# Altium PCB LoraNode.PcbDoc
Units mil, origin at the board's own origin, x right, y up, seen from the top; angles counter-clockwise.
Board outline 3242.69 x 2099.03 mil, 2 copper layers (Top Layer, Bottom Layer); 65 components, 42 nets, 235 pads, 95 vias.
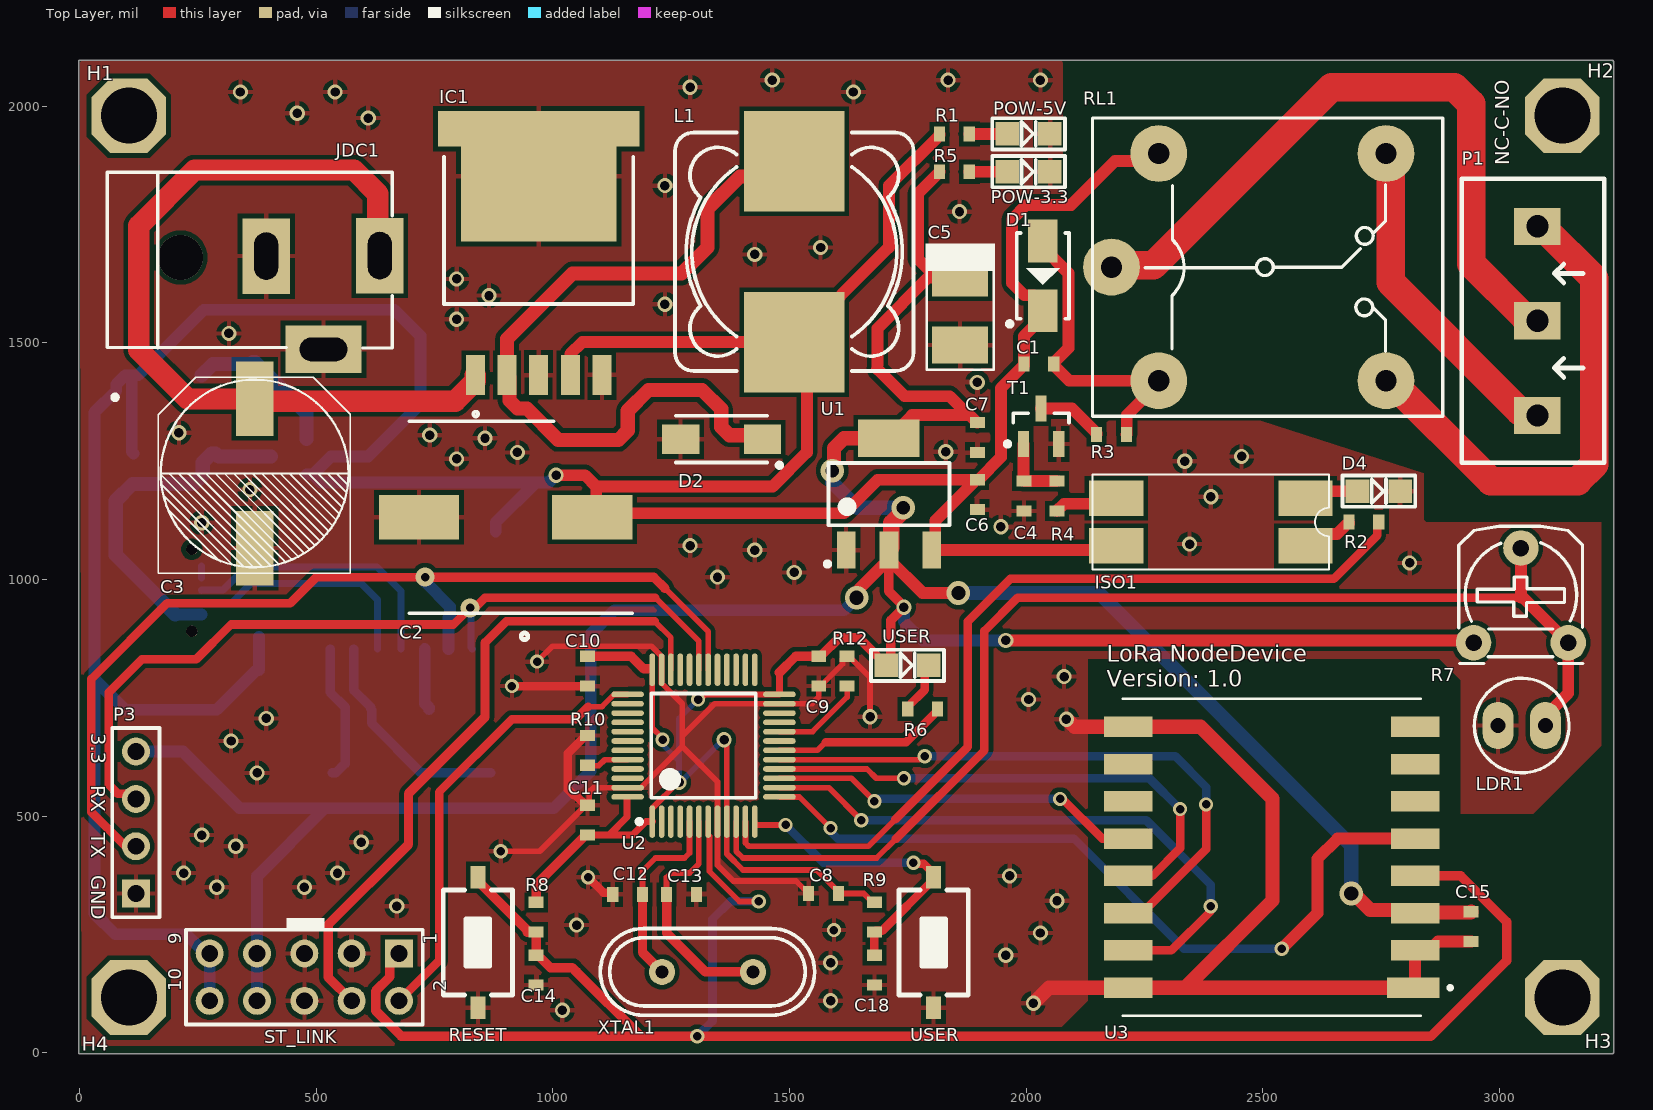
[diagram p0: Top Layer view]
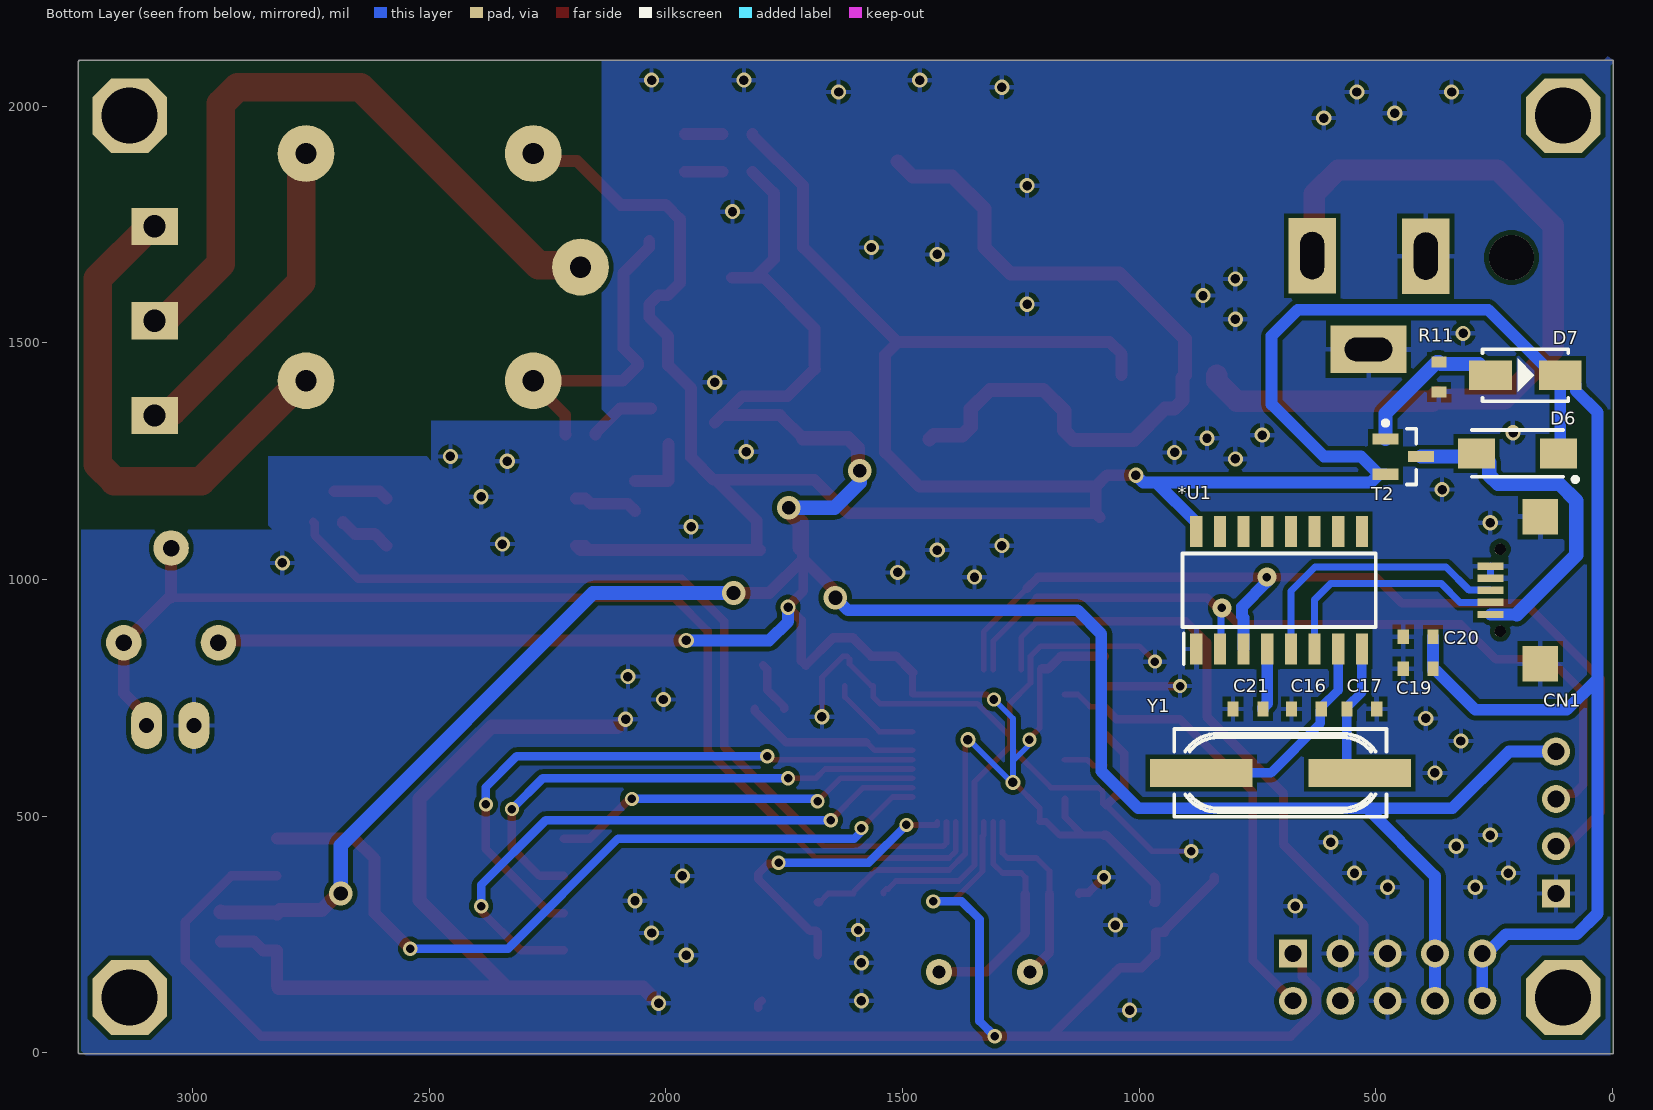
[diagram p1: Bottom Layer view, seen from below]
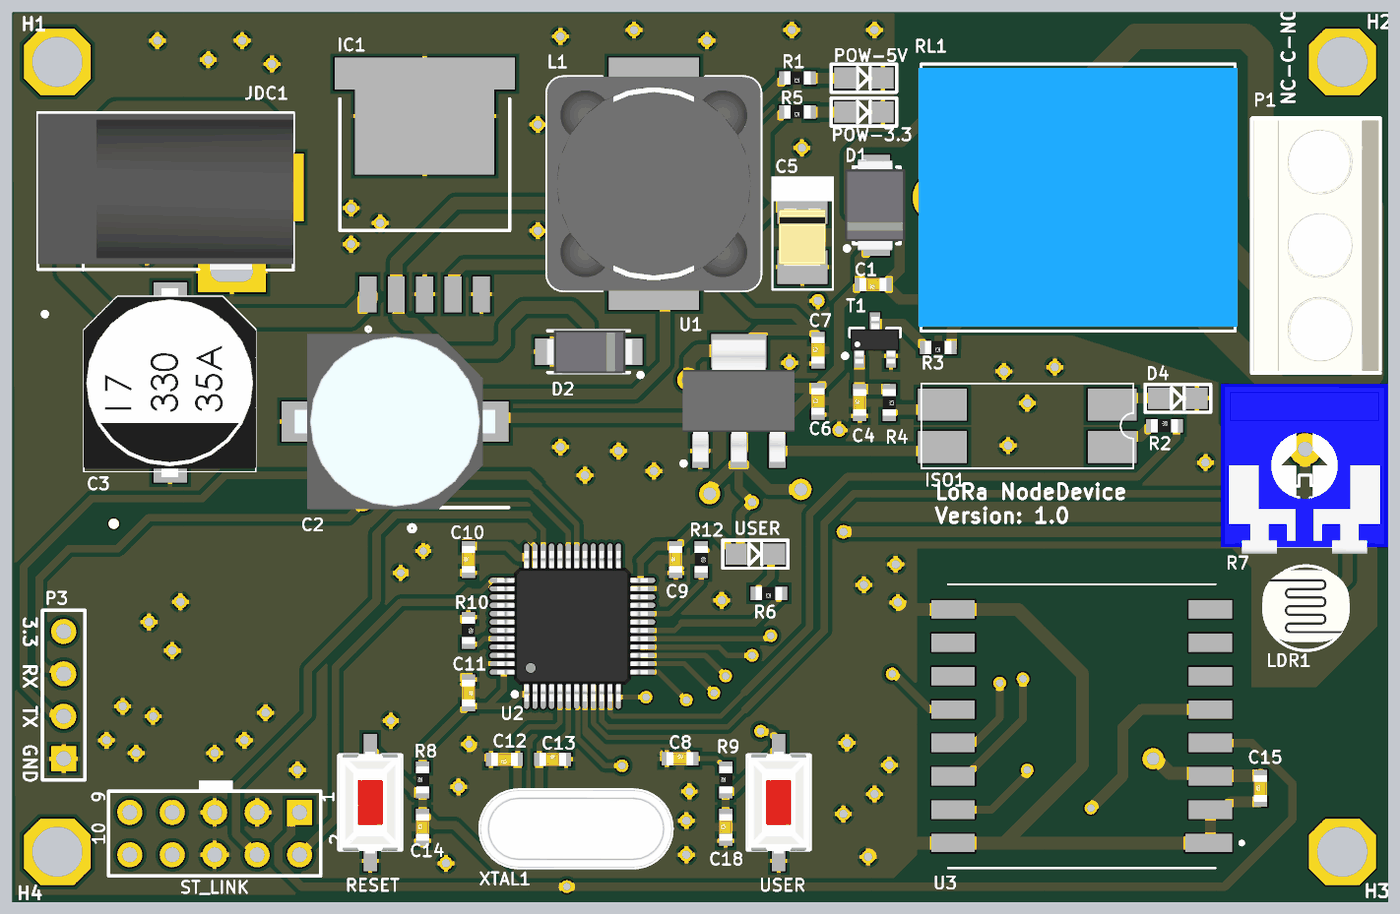
[diagram p2: 3D render of the assembled board from above, using the file's embedded part models]
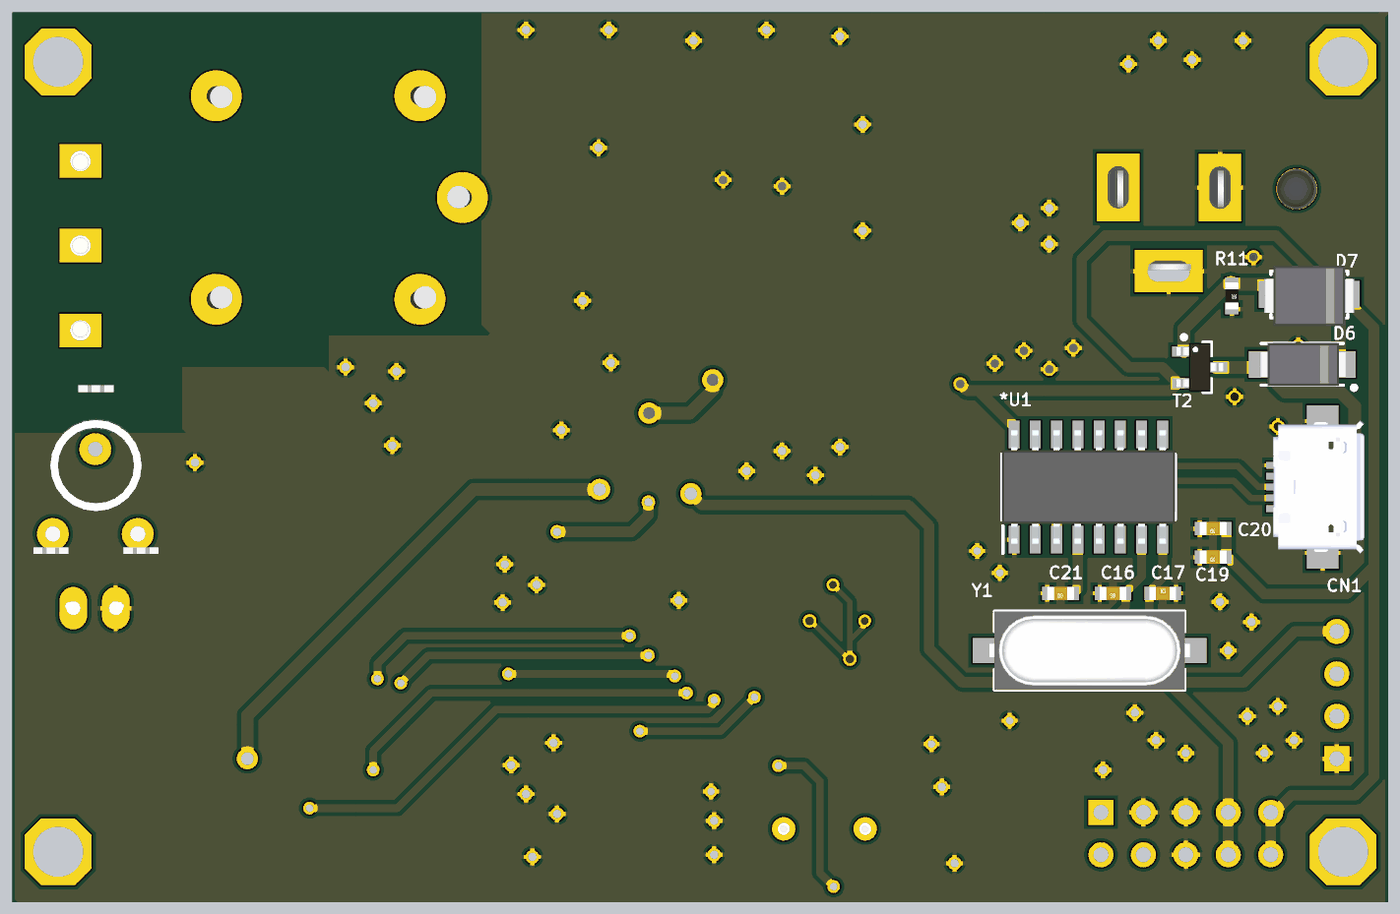
[diagram p3: 3D render of the assembled board from below, using the file's embedded part models]

## Layer stack, top to bottom
Top Solder: solder mask 0.4, Solder Resist, Dk 3.5
Top Layer: signal copper 1.4
Dielectric 1: dielectric 12.6, FR-4, Dk 4.8
Bottom Layer: signal copper 1.4
Bottom Solder: solder mask 0.4, Solder Resist, Dk 3.5

## Board outline
0,-2.01 cw(c0,0) -2.02,0 -2.02,2095 cw(c0,2095) 0,2097.02 3238.66,2097.02 cw(c3238.66,2095) 3240.68,2095 cw(c3238.66,2095) 3240.56,2094.33 cw(c3238.66,2093.66) 3240.68,2093.66 3240.68,0 cw(c3238.66,0) 3238.66,-2.01

## Design rules (kind name [scope] priority, off if disabled: settings)
Clearance [All] p1: gap=10 ignorepadtopadclearanceinfootprint=FALSE except(0: Arc-SMDPad Arc-Hole Track-SMDPad Track-Hole SMDPad-SMDPad SMDPad-Hole THPad-Hole Via-Hole Fill-Hole Poly-Hole Region-Hole Text-Hole; 5: Arc-Arc Arc-Track Track-Track)
MinimumSolderMaskSliver [All] p1 off: minsoldermaskwidth=10
PlaneConnect [All] p1: pad.planeconnectstyle=Direct pad.reliefexpansion=20 pad.reliefentries=2 pad.reliefconductorwidth=10 pad.reliefairgap=10 via.planeconnectstyle=Relief via.reliefexpansion=20 via.reliefentries=4 via.reliefconductorwidth=15 via.reliefairgap=30
PolygonConnect PolygonConnect_1 [All] p1: connectstyle=Relief reliefconductorwidth=10 reliefentries=4 polygonreliefangle="90 Angle" airgapwidth=10
PolygonConnect [All] p2: connectstyle=Relief reliefconductorwidth=10 reliefentries=4 polygonreliefangle="45 Angle" airgapwidth=10
RoutingCorners [All] p1: cornerstyle=45-Degree minsetback=80 maxsetback=100
RoutingVias [All] p1: holewidth=18 width=30 viastyle="Through Hole" minholewidth=18 minwidth=30 maxholewidth=30 maxwidth=50
SilkToSilkClearance [All] p1 off: silktosilkclearance=10
SilkToSolderMaskClearance [IsPad] p1 off: minsilkscreentomaskgap=10 clearancetoexposedcopper=TRUE
SolderMaskExpansion [All] p1: expansion=4 istentingtop=FALSE
UnRoutedNet [All] p1: checkbadconnections=TRUE
Width [All] p1: maxlimit=60 minlimit=12 preferedwidth=18
24 further rules are at their usual default settings.

## Components (designator, comment, footprint, x,y, rotation, side; value= is the part's Value field where it differs from the comment)
*U1 "CH340G" SOIC127P680X230-16N 704.39,977.31 r90 bottom
C1 "Cap" "0603 CAP" 2026.46,1455 r180 top value="104, 0603"
C2 "EEEFK1H221P" CAPAE1030X1080N 900,1131.56 r180 top
C3 "Cap Pol2" "Cap SMD 10x10x10,5" 370,1224.04 r270 top value=680uF/16V
C4 "Cap" "0603 CAP" 1995,1176.56 r90 top value="104, 0603"
C5 "Cap Pol2" "Cap size B" 1860,1566.56 r270 top value=10uF/16V
C6 "Cap" "0603 CAP" 1896.61,1179.4 r90 top value="104, 0603"
C7 "Cap" "0603 CAP" 1896.61,1299.95 r90 top value="104, 0603"
C8 "Cap" "0603 CAP" 1571.61,336.56 r0 top value="104, 0603"
C9 "Cap" "0603 CAP" 1561.61,806.52 r90 top value="104, 0603"
C10 "Cap" "0603 CAP" 1073.23,806.52 r90 top value="104, 0603"
C11 "Cap" "0603 CAP" 1073.23,491.56 r270 top value="104, 0603"
C12 "Cap" "0603 CAP" 1157.8,335 r180 top value="104, 0603"
C13 "Cap" "0603 CAP" 1271.61,335 r0 top value="104, 0603"
C14 "Cap" "0603 CAP" 964.72,174.81 r90 top value="104, 0603"
C15 "Cap" "0603 CAP" 2940,266.56 r90 top value="104, 0603"
C16 "Cap" "0603 CAP" 646.61,726.56 r0 bottom value="22pF, 0603"
C17 "Cap" "0603 CAP" 529.39,726.56 r180 bottom value="22pF, 0603"
C18 "Cap" "0603 CAP" 1679.27,174.81 r90 top value="104, 0603"
C19 "Cap" "0603 CAP" 410.57,811.56 r0 bottom value="22uF, 0603"
C20 "Cap" "0603 CAP" 410.57,879.06 r0 bottom value="0.1uF, 0603"
C21 "Cap" "0603 CAP" 770,726.56 r0 bottom value="0.1uF, 0603"
CN1 "Micro USB type B" USB-B-Micro-Hole 152.52,977.31 r270 bottom
D1 "1N4007" "DO 214" 2035,1641.56 r270 top
D2 "D Schottky" DO-214AC 1356.46,1296.56 r180 top
D4 "LED, 0805" LED0805 2745,1186.56 r0 top
D6 "D Schottky" DO-214AC 200.55,1266.56 r0 bottom
D7 "BZT52C5V1" "DO 214" 184.02,1431.56 r180 bottom
H1 "HOLE" HOLE#1 104.27,1980 r0 top
H2 "HOLE" HOLE#1 3132.6,1980 r0 top
H3 "HOLE" HOLE#1 3132.6,117 r0 top
H4 "HOLE" HOLE#2 104.27,145 r0 top
IC1 "LM2596S-5.0" KTT0005B 970,1922.47 r270 top
ISO1 "OPTO" "PC817 SMD" 2540,1121.56 r90 top value=TLP5211
JDC1 "Jac DC" DC-IN 634.39,1684.25 r0 top
L1 "CDRH127 68uH 3A" IND_BOURNS_SRR1260 1510,1692.51 r270 top
LDR1 "CDS 12mm 12528" CDS 2996.78,691.56 r0 top
P1 "Header 3 - M" "Medium - Header 3" 3080,1346.56 r90 top
P3 "Header 4" HDR1X4 119.13,336.56 r90 top
POW-3.3 "LED, 0805" LED0805 2005,1861.56 r0 top (schematic designator D5)
POW-5V "LED, 0805" LED0805 2005,1941.56 r0 top (schematic designator D3)
R1 "Resistor" "0603 RESISTOR" 1848.28,1941.56 r180 top value="330, 0603"
R2 "Resistor" "0603 RESISTOR" 2713.27,1121.56 r0 top value="330, 0603"
R3 "Resistor" "0603 RESISTOR" 2180.12,1306.56 r180 top value="1K, 0603"
R4 "Resistor" "0603 RESISTOR" 2065,1176.56 r270 top value="1K, 0603"
R5 "Resistor" "0603 RESISTOR" 1848.28,1861.56 r180 top value="330, 0603"
R6 "Resistor" "0603 RESISTOR" 1781,726.63 r180 top value="330, 0603"
R7 "VR103" VR 2945,866.56 r0 top value=10K
R8 "Resistor" "0603 RESISTOR" 964.72,286.56 r90 top value="10K, 0603"
R9 "Resistor" "0603 RESISTOR" 1679.27,286.56 r90 top value="10K, 0603"
R10 "Resistor" "0603 RESISTOR" 1073.23,639.2 r270 top value="10K, 0603"
R11 "Resistor" "0603 RESISTOR" 366.61,1428.02 r270 bottom value="100K, 0603"
R12 "Resistor" "0603 RESISTOR" 1621.61,806.52 r270 top value="10K, 0603"
RESET "SMD 3x6" SW-SMD 841.61,233.22 r90 top (schematic designator S1)
RL1 "Relay 10A/5V" RL_SPDT_10A 2180,1660 r0 top value="Relay SPDT, 10A, 12V"
ST_LINK "Header 5X2" HDR2X5 675,210 r180 top (schematic designator P2)
T1 "MMBT3904" "SOT23 - 3PIN" 2031.38,1323.96 r90 top
T2 "" "SOT23 - 3PIN" 442.06,1259.67 r180 bottom
U1 "lm1117 DC" SOT230P700X175-4N 1710,1180.44 r90 top
U2 "Stm32f103c8t6" "LQFP 48 PIN" 1318.23,649.04 r90 top
U3 "RA-02_LORA" MODULE_RA-02_LORA 2518.46,413.27 r180 top
USER "SMD 3x6" SW-SMD 1804.27,233.22 r90 top (schematic designator S2)
USER "LED, 0805" LED0805 1749.27,818.8 r0 top (schematic designator 1)
XTAL1 "XTAL_2Pin" XTAL_HC-49/U 1326.61,171.14 r180 top
Y1 "12MHz" XTAL_CITIZEN_HCM49 701.61,591.56 r0 bottom

## Footprints (in the part's own frame and the unit in brackets; to place one, negate y for a bottom-side part, rotate by r counter-clockwise, add the part's x,y. Pads: shape width x height; smd on the part's side, far side on the other; paste and mask are expansions set on the pad)
"0603 CAP" [mm] "Chip Resistor, Empaque 0603"
  rect 0.6x0.8 smd: 1(-0.8,0) 2(0.8,0)
  body extent -0.8,-0.4 0.8,0.4, height 0.29
"0603 RESISTOR" [mm] "Chip Resistor, Empaque 0603"
  rect 0.6x0.8 smd: 1(-0.8,0) 2(0.8,0)
  body extent -0.8,-0.4 0.8,0.4, height 0.3
"Cap size B" [mm]
  rect 2x3 smd paste+0: 1(-1.8,0) 2(1.8,0)
  silkscreen extent -3.64,-1.85 3.14,1.89, body extent -1.75,-1.4 1.75,1.4, height 1.91
"Cap SMD 10x10x10,5" [mm] "Body 10x10x10,5"
  rect 4x2 smd: 1(-4,0.01) 2(4,0)
  silkscreen extent -5.17,-5.17 5.35,5.12, body extent -5.63,-5.17 5.67,5.13, height 10.61
CAPAE1030X1080N [mm]
  rect 4.3x2.4 smd: 1(-4.65,0) 2(4.65,0)
  silkscreen extent -6.8,-5.15 5.15,5.15, body extent -6,-5.25 6,5.25, height 10.8
CDS [mil] "QUANG TRO"
  oval 65x100 hole 32: 1(0,0) 2(100,0)
  silkscreen extent -50,-100 150,100, body extent -53,-80 153,89, height 138
DC-IN [mil] "Jac DC input"
  rect 100x160 hole 50 slot 100 at 90 deg: 1(0,0) 2(-240,-1)
  rect 160x100 hole 50 slot 100 at 0 deg: 3(-119,-198)
  silkscreen extent -576,-195 26,176, body extent -576,-195 26,173, height 434
"DO 214" [mm] "diode SMD 214, 2-Leads, Body 5.2x2.36mm, IPC Medium Density"
  rect 2.3x1.6 smd: 1(-1.875,0) 2(1.875,0)
  silkscreen extent -2.3,-1.4 2.3,1.4, body extent -2.7,-1.89 2.7,1.71, height 2.29
DO-214AC [mm] "Molded Diode, 2-Leads, Body 5.1x2.7mm, IPC Medium Density"
  rect 2x1.6 smd: 1(2.2,0) 2(-2.2,0)
  silkscreen extent -3.22,-1.25 2.45,1.52, body extent -2.66,-1.29 2.54,1.31, height 2.4
HDR1X4 [mm] "Connector; Header; 4 Position"
  rect 1.5x1.5 hole 0.9: 1(0,0)
  round 1.5 hole 0.9: 2(2.54,0) 3(5.08,0) 4(7.62,0)
  silkscreen extent -1.27,-1.27 8.89,1.27, body extent -1.27,-1.27 8.89,1.27, height 7
HDR2X5 [mm] "Connector; Header; 5x2 Position"
  rect 1.5x1.5 hole 0.9: 1(0,0)
  round 1.5 hole 0.9: 2(0,2.54) 3(2.54,0) 4(2.54,2.54) 5(5.08,0) 6(5.08,2.54) 7(7.62,0) 8(7.62,2.54) 9(10.16,0) 10(10.16,2.54)
  silkscreen extent -1.27,-1.27 11.43,3.81, body extent -1.27,-1.27 11.43,3.81, height 7
HOLE#1 [mm]
  oct 4x4 hole 3: H(0,0)
HOLE#2 [mm]
  oct 4x4 hole 3: H(0,-0.711)
IND_BOURNS_SRR1260 [mm] "SMD Inductor  Body Width 12.5mm Body Lenght 12.5mm Height 6.5mm"
  rect 5.4x5.4 smd: 1(-4.85,0) 2(4.85,0)
  silkscreen extent -6.4,-6.4 6.4,6.4, body extent -6.4,-6.4 6.4,6.4, height 6.5
KTT0005B [mm]
  rect 2.16x1.02 smd: 1(12.461,-3.4) 2(12.461,-1.7) 3(12.461,0) 4(12.461,1.7) 5(12.461,3.4)
  rect 6.99x8.33 smd: 6(1.786,0)
  rect 1.91x1.235 smd: 7(-0.754,4.783) 8(-0.754,-4.783)
  silkscreen extent 0.76,-5.08 14.68,5.08
LED0805 [mil] "Chip Resistor; Body 2.0 x 1.3 mm (LxW typ)"
  rect 50x50 smd: 1(-45,0) 2(45,0)
  silkscreen extent -77,-33 77,33, body extent -60,-25 60,25, height 47
"LQFP 48 PIN" [mm] "TSQFP, 48-Leads, Body 9.2x9.2mm (max), Pitch 0.50mm, IPC Medium Density"
  oval 1.75x0.3 smd: 1(-4.075,2.75) 2(-4.075,2.25) 3(-4.075,1.75) 4(-4.075,1.25) 5(-4.075,0.75) 6(-4.075,0.25) 7(-4.075,-0.25) 8(-4.075,-0.75) 9(-4.075,-1.25) 10(-4.075,-1.75) 11(-4.075,-2.25) 12(-4.075,-2.75) 25(4.075,-2.75) 26(4.075,-2.25) 27(4.075,-1.75) 28(4.075,-1.25) 29(4.075,-0.75) 30(4.075,-0.25) 31(4.075,0.25) 32(4.075,0.75) 33(4.075,1.25) 34(4.075,1.75) 35(4.075,2.25) 36(4.075,2.75)
  oval 0.3x1.75 smd: 13(-2.75,-4.075) 14(-2.25,-4.075) 15(-1.75,-4.075) 16(-1.25,-4.075) 17(-0.75,-4.075) 18(-0.25,-4.075) 19(0.25,-4.075) 20(0.75,-4.075) 21(1.25,-4.075) 22(1.75,-4.075) 23(2.25,-4.075) 24(2.75,-4.075) 37(2.75,4.075) 38(2.25,4.075) 39(1.75,4.075) 40(1.25,4.075) 41(0.75,4.075) 42(0.25,4.075) 43(-0.25,4.075) 44(-0.75,4.075) 45(-1.25,4.075) 46(-1.75,4.075) 47(-2.25,4.075) 48(-2.75,4.075)
  silkscreen extent -4.2,-2.8 2.8,3.57, body extent -4.5,-4.5 4.5,4.5, height 1.45
"Medium - Header 3" [mm]
  rect 2x2.5 hole 1.2: 1(0,0) 2(5.08,0) 3(10.147,0)
  silkscreen extent -2.54,-3.58 12.7,4.06, body extent -2.42,-3.51 12.58,3.99, height 10
MODULE_RA-02_LORA [mm]
  rect 2.8x1.1 smd: 1(-7.6,7)
  rect 2.6x1.1 smd: 2(-7.7,5) 3(-7.7,3) 4(-7.7,1) 5(-7.7,-1) 6(-7.7,-3) 7(-7.7,-5) 8(-7.7,-7) 9(7.7,-7) 10(7.7,-5) 11(7.7,-3) 12(7.7,-1) 13(7.7,1) 14(7.7,3) 15(7.7,5) 16(7.7,7)
  silkscreen extent -9.68,-8.5 8,8.5
"PC817 SMD" [mil] "Modify"
  rect 75x115 smd: 1(-50,-50) 2(50,-50) 3(50,350) 4(-50,350)
  silkscreen extent -100,-100 100,400
RL_SPDT_10A [mil] "Relay SPDT, 5 pin, 10A,W 650mil, L 800mil, H 800mil"
  round 120 hole 45: 1(0,0) 2(580,240) 3(580,-240) 4(100,-240) 5(100,240)
  silkscreen extent -40,-315 700,315, body extent -46,-304 706,306, height 602
SOIC127P680X230-16N [mm]
  rect 1.65x0.65 smd: 1(-3.15,4.445) 2(-3.15,3.175) 3(-3.15,1.905) 4(-3.15,0.635) 5(-3.15,-0.635) 6(-3.15,-1.905) 7(-3.15,-3.175) 8(-3.15,-4.445) 9(3.15,-4.445) 10(3.15,-3.175) 11(3.15,-1.905) 12(3.15,-0.635) 13(3.15,0.635) 14(3.15,1.905) 15(3.15,3.175) 16(3.15,4.445)
  silkscreen extent -3.98,-5.18 1.97,5.19, body extent -3.4,-5.19 3.4,5.18, height 2.3
"SOT23 - 3PIN" [mm]
  rect 1.4x0.6 smd: 1(-0.95,0.95) 2(-0.95,-0.95) 3(0.95,0)
  silkscreen extent -1.07,-1.5 0.7,1.92, body extent -1.4,-1.45 1.4,1.45, height 1.29
SOT230P700X175-4N [mm] "SOT223, 2.30mm pitch; 3 pin, 3.70mm W X 6.70mm L, IPC Medium Density"
  rect 2x1 smd: 1(-3,2.3) 2(-3,0) 3(-3,-2.3)
  rect 2x3.3 smd: 4(3,0)
  silkscreen extent -3.87,-3.25 1.68,3.42, body extent -3.65,-3.35 3.65,3.35, height 1.75
SW-SMD [mm] "Switch SMD type"
  rect 1.2x0.8 smd: 1(-3.5,0) 2(3.5,0)
  silkscreen extent -2.82,-1.85 2.82,1.85, body extent -3.05,-1.85 3.05,1.85, height 2.5
USB-B-Micro-Hole [mm]
  round 0.6 hole 0.6: 0(-2.2,-2.15) 0(2.2,-2.15)
  rect 0.4x1.4 smd: 1(1.3,-2.675) 2(0.65,-2.675) 3(0,-2.675) 4(-0.65,-2.675) 5(-1.3,-2.675)
  rect 1.9x1.9 smd: 6(-3.95,0) 7(3.95,0)
  body extent -3.99,-2.95 3.99,2.48, height 2.71
VR [mil] "Resistor Variable"
  round 75 hole 35: 1(0,0) 2(100,200) 3(200,0)
  silkscreen extent -31,-44 231,246, body extent -98,-47 295,354, height 165
XTAL_CITIZEN_HCM49 [mm] "CITIZEN HCM49 Case, SMD Cristal, Body 11.4 x 4.7mm"
  rect 5.5x1.5 smd: 1(-4.25,0) 2(4.25,0)
  silkscreen extent -5.7,-2.35 5.7,2.35, body extent -6,-2.35 6,2.35, height 4.3
XTAL_HC-49/U [mm] "HC-49/U Leaded Cristal, Body 11.05x4.8mm; Pitch 4.88mm"
  round 1.4 hole 0.7: 1(-2.44,0) 2(2.44,0)
  silkscreen extent -5.75,-2.33 5.75,2.33, body extent -5.75,-2.33 5.75,2.33, height 3.5

## Part data
C1 C4 C6 C7 C8 C9 C10 C11 C12 C13 C14 C15 C16 C17 C18 C19 C20 C21: "Capacitor", LatestRevisionDate=17-Jul-2002, LatestRevisionNote="Re-released for DXP Platform.", PackageReference=RAD-0.3, Published=8-Jun-2000, Publisher="Altium Limited"
C2: "Capacitor Polarised", Manufacturer_Name=Panasonic, Arrow Part Number=EEEFK1H221P, Arrow Price/Stock=https://www.arrow.com/en/products/eeefk1h221p/panasonic, Datasheet Link=https://industrial.panasonic.com/cdbs/www-data/pdf/RDE0000/ABA0000C1181.pdf, Height=10.8mm, Manufacturer_Part_Number=EEEFK1H221P
C3 C5: "Polarized Capacitor (Axial)", LatestRevisionDate=17-Jul-2002, LatestRevisionNote="Re-released for DXP Platform.", PackageReference=POLAR0.8, Published=8-Jun-2000, Publisher="Altium Limited"
CN1: library part USB_MICRO_TYPE_B
D1: library part Diode, "Default Diode", Code_JEDEC=DO-214-AB, LatestRevisionDate=17-Jul-2002, LatestRevisionNote="Re-released for DXP Platform.", PackageReference=SMC, PackageVersion=Sep-1996, Published=8-Jun-2000, Publisher="Altium Limited"
D2 D6: "Schottky Diode", Code_JEDEC=DO-214-AA, LatestRevisionDate=17-Jul-2002, LatestRevisionNote="Re-released for DXP Platform.", PackageReference=SMB, Published=8-Jun-2000, Publisher="Altium Limited"
D4 POW-3.3 POW-5V USER: library part LED, "Typical INFRARED GaAs LED", LatestRevisionDate=08-Jul-2005, LatestRevisionNote="Mech Layer 1 removed.", PackageReference=LED-0, Published=8-Jun-2000, Publisher="Altium Limited"
D7: library part "Diode Zener", "Zener Diode", LatestRevisionDate=17-Jul-2002, LatestRevisionNote="Re-released for DXP Platform.", PackageReference=DIODE-0.7, Published=8-Jun-2000, Publisher="Altium Limited"
IC1: "Integrated Circuit", Manufacturer_Name="Texas Instruments", Mouser Part Number=926-LM2596S-50, Arrow Part Number=LM2596S-5.0, Arrow Price/Stock=https://www.arrow.com/en/products/lm2596s-5.0/texas-instruments, Datasheet Link=https://www.ti.com/lit/gpn/LM2596, Manufacturer_Part_Number=LM2596S-5.0, Mouser Price/Stock=https://www.mouser.co.uk/ProductDetail/Texas-Instruments/LM2596S-50/?qs=X1J7HmVL2ZGcOr96VNr%252B%2Fw%3D%3D
JDC1: library part DCIN, "Jac DC input"
L1: library part Inductor, "Inductor"
LDR1: library part LDR, "Quang Tro"
P1: "Header, 3-Pin, Medium", LatestRevisionDate=17-Jul-2002, LatestRevisionNote="Re-released for DXP Platform.", Publisher="Altium Limited"
P3: "Header, 4-Pin", LatestRevisionDate=17-Jul-2002, LatestRevisionNote="Re-released for DXP Platform.", Publisher="Altium Limited"
R1 R2 R3 R4 R5 R6 R8 R9 R10 R11 R12: "Semiconductor Resistor", LatestRevisionDate=17-Jul-2002, LatestRevisionNote="Re-released for DXP Platform.", PackageReference=AXIAL-0.5, Published=8-Jun-2000, Publisher="Altium Limited"
R7: library part RPot, "Potentiometer", LatestRevisionDate=17-Jul-2002, LatestRevisionNote="Re-released for DXP Platform.", PackageReference=VR5, Published=8-Jun-2000, Publisher="Altium Limited", Set Position=0.5, Sim Note="Enter the Resistance value and the set point into parameter fields."
RESET USER: library part SW-PB, "Switch", LatestRevisionDate=17-Jul-2002, LatestRevisionNote="Re-released for DXP Platform.", PackageReference=SPST-2, Published=24-Mar-1999, Publisher="Altium Limited"
RL1: library part "Relay 1", "Relay SPDT,10A - 12VDC 5 Pin"
ST_LINK: "Header, 5-Pin, Dual row", LatestRevisionDate=17-Jul-2002, LatestRevisionNote="Re-released for DXP Platform.", Publisher="Altium Limited"
T1: library part "NPN B1 E2 C3", "NPN Transistor, 1B 2E 3C"
T2: library part "P-MOSFET-D 1G 2S 3D", "P-CHANNEL MOSFET WITH DIODE"
U1: library part lm1117, "lm1117"
U3: "Ra-02 LoRa RF M5Stack Platform Evaluation Expansion Board", Package=Package, Availability=Unavailable, Check_prices=https://www.snapeda.com/parts/Ra-02%20LoRa/AI-Thinker/view-part/4449259/?ref=eda, MF=AI-Thinker, MP="Ra-02 LoRa", Price=None, SnapEDA_Link=https://www.snapeda.com/parts/Ra-02%20LoRa/AI-Thinker/view-part/4449259/?ref=snap
Y1: library part XTAL, "Crystal Oscillator", LatestRevisionDate=17-Jul-2002, LatestRevisionNote="Re-released for DXP Platform.", PackageReference=R38, Published=8-Jun-2000, Publisher="Altium Limited"

## Via types
v1: diameter 32, hole 20, Top Layer to Bottom Layer, 66 vias
v2: diameter 30, hole 18, Top Layer to Bottom Layer, 21 vias
v3: diameter 50, hole 30, Top Layer to Bottom Layer, 3 vias
v4: diameter 50, hole 28, Top Layer to Bottom Layer, 2 vias
v5: diameter 40, hole 18, Top Layer to Bottom Layer, 2 vias
v6: diameter 94.49, hole 94.49, Top Layer to Bottom Layer, 1 vias

## Nets (pads, with @x,y where several pads share a name; then routed paths per layer and width w, separated by ;. In a path a pad name is that pad's centre, name@x,y a point inside that pad or via, vN(x,y) a via of type N, cw(c..) or ccw(c..) an arc to the next point about the centre after c; other vN are vias at no path point)
3V3: C5.1 C7.2 C8.2 C9.2 C10.2 C11.2 C15.2 P3.4 R5.2 R7.1 R8.2 R9.2 ST_LINK.7 ST_LINK.8 U1.2 U1.4 U2.1 U2.9 U2.24 U2.36 U2.48 U3.3 USER.1@1704.27,818.8 | length 9421.8
  Top Layer w12: U2.1 1209.96,516.96 1264.56,571.56 v1(1266.61,571.56) ; U2.36 1209.96,686.58 1231.61,664.92 v2(1231.61,661.56) ; v2(1306.61,746.56) 1311.48,746.56 1322.23,757.31 U2.24 ; v1(1361.61,661.56) 1361.61,656.15 1367.44,650.32 U2.9 1367.44,420.73 1401.61,386.56 1557.05,386.56 1603.11,340.5 C8.2 1656.83,336.56 R9.2@1675.33,318.06
  Top Layer w15: C11.2@1073.58,460.42 1118.98,460.42 ; U2.48@1156.61,536.68 1156.61,498.06 1118.98,460.42 ; U2.1 1196.61,488.61 1168.43,460.42 1118.98,460.42 ; U2.24@1478.66,758.62 1478.66,803.61
  Top Layer w18: R9.2@1675.33,318.06 R9.2
  Top Layer w20: R8.2@968.66,318.06 R8.2 964.72,355.5 1069.29,460.07 C11.2 ; C10.2 1165.16,838.02 1191.61,811.56 U2.36@1205.86,811.56 ; 1478.66,803.61 1513.07,838.02 C9.2 1565.55,838.02 1604.09,876.56 1646.51,876.56 1704.27,818.8 1713.85,828.38 1713.85,913.8 v1(1741.61,941.56) 1741.61,943.39 1710,975 U1.2@1710,1042.65
  Top Layer w25: v3(1641.61,961.56) 1646.4,966.35 1646.4,979.05 U1.2@1710,1042.65 ; 1685,1445 1742.89,1387.11 1838.39,1387.11 1875.5,1350 ; 1685.89,1455 1685.89,1530.89 1792.43,1637.43 C5.1@1810.75,1637.43 ; U1.4 1758.75,1347.3 1880.76,1347.3 C7.2 ; U1.2@1714.81,1067.15 U1.2 U1.2@1710,1042.65 ; v4@1740,1144.8 v4(1740,1151.56) ; R5.2 1771.61,1816.4 1771.61,1676.56 C5.1@1810.75,1637.43 ; v3(1856.61,971.56) 1781.09,971.56 U1.2@1710,1042.65 ; C5.1 C5.1@1810.75,1637.43 ; v1(1956.61,871.56) 2940,871.56 R7.1
  Top Layer w30: v4(1590,1230) 1593.83,1233.83 1593.83,1277.38 1615,1298.55 U1.4 ; v3(2686.61,336.56) 2692.03,336.56 2726.77,301.81 2814.96,301.81 U3.3 2823.06,296.61 2939.25,296.61 2940,297.36 C15.2
  Top Layer w35: U1.2@1714.81,1067.15 1714.81,1119.61 v4@1740,1144.8
  Bottom Layer w12: v2@1231.58,661.53 1231.58,651.59 1266.61,616.56 ; v2(1306.61,746.56) 1266.61,706.56 1266.61,616.56 ; v1(1361.61,661.56) 1359.11,661.56 1269.11,571.56 v1(1266.61,571.56) 1266.61,616.56
  Bottom Layer w25: P3.4 218.58,636.56 338.18,516.96 518.37,516.96 ; ST_LINK.8 ST_LINK.7 375,373.59 518.37,516.96 ; v3(1641.61,961.56) 1615.05,935 1130.05,935 1080,884.95 1080,595 1001.96,516.96 518.37,516.96 ; v1(1741.61,941.56) 1741.61,911.25 1781.31,871.56 v1(1956.61,871.56)
  Bottom Layer w30: v4(1590,1230) 1590,1205 1643.44,1151.56 v4(1740,1151.56) ; v3(1856.61,971.56) 2153.44,971.56 2686.61,438.39 v3(2686.61,336.56)
5V: *U1.16 C1.2 C2.1 C6.2 C19.1 C20.1 D1.2 D6.2 D7.2 IC1.4 ISO1.4 L1.2 R1.2 RL1.5 ST_LINK.9 ST_LINK.10 T2.2 U1.3 | length 8435.9
  Top Layer w25: v1(1006.61,1220.24) 1067.93,1220.24 1091.61,1196.56 ; IC1.4 1036.93,1476.56 1061.93,1501.56 L1.2 ; C2.1 C2.1@1091.61,1140.1 ; R1.2 1816.78,1939 1709.95,1832.17 1709.95,1701.51 L1.2 ; ISO1.4@2170,1071.56 ISO1.4 2180.77,1062.33 U1.3 1807.74,1069.52 1807.74,1124.58 C6.2@1894.05,1210.89 ; RL1.5@2285,1900 2282.5,1897.5 2269.06,1884.06 2187.5,1884.06 2095,1791.56 2000,1791.56 1970,1761.56 1970,1626.21 1995.69,1600.52 2016,1600.52 2035,1581.52 D1.2 2035,1553.96 1994.96,1513.93 C1.2 1994.96,1452.44 1946.61,1404.09 1946.61,1258.33 1899.17,1210.89 C6.2 C6.2@1894.05,1210.89 ; C2.1@1091.61,1140.1 1615.1,1140.1 1685.89,1210.89 C6.2@1894.05,1210.89 ; C2.1@1091.61,1140.1 1091.61,1196.56 ; 1091.61,1196.56 1464.63,1196.56 1536.61,1268.54 1536.61,1474.95 L1.2
  Bottom Layer w25: D6.2 110.2,1270.3 D7.2 ; ST_LINK.10 ST_LINK.9 265.78,210 225.05,250.73 75.36,250.73 31.61,294.48 31.61,789.55 ; C20.1 379.07,809 378.38,808.31 373.37,808.31 289.8,724.75 96.42,724.75 31.61,789.55 ; T2.2 493.84,1222.27 531.57,1260 610,1260 720,1370 720,1515 665,1570 262.41,1570 123.98,1431.56 D7.2 ; T2.2@493.84,1221.58 510.42,1205 963.38,1205 ; *U1.16 879.39,1121.01 963.38,1205 ; v1(1006.61,1220.24) 991.37,1205 963.38,1205 ; 31.61,789.55 31.61,1352.98 77.42,1398.79 77.42,1412.57 96.42,1431.56 D7.2
12V: C3.1 IC1.1 JDC1.1 | length 1763.2
  Top Layer w45: JDC1.1 630,1688.63 630,1815 580,1865 242.82,1865 125,1747.18 125,1485 228.48,1381.52 C3.1 370.39,1386.88 380.71,1376.56 793.42,1376.56 836.14,1419.28 IC1.1
GND: *U1.1 C2.2 C3.2 C4.1 C5.2 C6.1 C7.1 C8.1 C9.1 C10.1 C11.1 C12.2 C13.2 C14.1 C15.1 C16.2 C17.2 C18.1 C19.2 C20.2 C21.2 CN1.4 CN1.5 CN1.6 CN1.7 D2.1 D4.2 IC1.3 IC1.5 IC1.6 JDC1.2 JDC1.3 LDR1.1 P3.1 POW-3.3.2 POW-5V.2 R10.1 R11.2 R12.1 RESET.1 ST_LINK.3 ST_LINK.5 ST_LINK.6 T1.2 U1.1 U2.8 U2.23 U2.35 U2.47 U3.1 U3.2 U3.9 U3.16 USER.1@1804.27,95.42 | length 4531.3
  Top Layer w12: v2(890,426.05) 972.28,426.05 1069.29,523.06 C11.1 1076.61,526.44 1076.61,551.56 1085.51,560.46 U2.47 1186.15,560.46 1273.14,647.45 ; v2(966.61,826.56) 999.07,859.02 1208.46,859.02 1229.65,837.83 U2.35 1229.65,781.12 1273.14,737.62 1273.14,669.25 ; C8.1 1540.12,340.5 1534.31,346.31 1530.37,346.31 1513.54,363.14 1381,363.14 1347.76,396.38 U2.8 1347.76,572.84 1273.14,647.45 ; C9.1 1561.61,751.56 1547.68,737.62 U2.23 1341.52,737.62 1273.14,669.25 ; C9.1 1565.55,775.03 1611.87,821.34 1611.87,832.21 1617.68,838.02 R12.1 1625.55,838.02 1670,793.57 v1(1670,710) ; 1273.14,647.45 1273.14,669.25
  Top Layer w18: v2(913.44,775.03) C10.1 ; C11.1@1069.29,523.06 1047.97,544.38 1044.34,544.38 1031.61,557.11 1031.61,633.02 1069.29,670.7 R10.1 ; v2(1074.37,371.01) 1106.88,338.5 1126.3,338.5 C12.2@1126.3,336.56 ; USER.1@1797.52,110.04 1804.27,103.29 USER.1@1804.27,95.42
  Top Layer w25: U3.1 2821.61,141.62 U3.2 2851.14,216.42 2869.79,235.07 C15.1
  Top Layer w30: v1(2015,105) 2015.54,105 2048.22,137.68 U3.16 2335.79,137.68 ; v1(2085,705) 2085.54,705 2101.68,688.86 U3.9 2367.95,688.86 2520,536.81 2520,321.89 2335.79,137.68 ; U3.1 2335.79,137.68
  Bottom Layer w15: CN1.4 CN1.5
  other v1: 1020,90 1586.61,110.04 1586.61,190.47 1956.61,206.3 2030,253.26 1050,270 670,310 2065,321.56 290,349.86 475,349.86 1965,373.9 220,380 545,380 330,436.56 595,445 258.06,460.07 375,591.56 320.05,658.88 394.39,706.56 2005,746.56 2080,795 1347.76,1005 1510,1015 2810,1035 1426.59,1062.33 1290,1071.56 2345,1075 1946.61,1111.56 258.06,1120 2390,1175 360,1190 2335,1250 796.67,1255 2455,1260 925,1268.45 1830,1270 856.56,1298.55 740,1305 210,1310 1896.61,1416.56 315.6,1520 796.67,1550 1236.61,1581.52 865,1600 796.67,1635 1426.5,1686.74 1565.55,1701.51 1858.98,1777.18 1236.61,1832.17 610,1975 460,1985 340,2030 540,2030 1635,2030 1290,2040 1463.33,2055 1835,2055 2030,2055
  other v2: 1593.83,259.38
Net1_2: R6.2 USER.2@1794.27,818.8 | length 110.7
  Top Layer w18: R6.2 1749.5,730.57 1785.73,766.8 1785.73,810.26 USER.2@1794.27,818.8
Net*U1_2: *U1.2 P3.3 U2.31 | length 1783.7
  Top Layer w12: 1216.61,961.56 1308.39,869.79 U2.31
  Top Layer w18: P3.3 108.02,536.56 97.14,547.44 80.89,547.44 61.61,566.72 61.61,761.56 131.61,831.56 246.61,831.56 320.05,905 790,905 v5(825,940) 835,940 856.56,961.56 1216.61,961.56
  Bottom Layer w12: v5(825,940) v5@829.71,935.29 ; *U1.2 *U1.2@829.71,853.61
  Bottom Layer w15: *U1.2@829.71,853.61 827.19,856.13 827.19,932.78 v5@829.71,935.29
Net*U1_3: *U1.3 P3.2 U2.30 | length 2100.6
  Top Layer w12: 1236.61,981.56 1328.07,890.1 U2.30
  Top Layer w18: P3.2 96.81,436.56 25,508.37 25,789.95 185.05,950 445,950 500,1005 v5(730,1005)
  Top Layer w20: v5(730,1005) 1213.18,1005 1236.61,981.56
  Bottom Layer w25: v5(730,1005) 730,995 782.5,942.5 782.5,922.4 779.39,919.28 *U1.3
Net*U1_4: *U1.4 C21.1 | length 130.5
  Bottom Layer w25: *U1.4 729.39,738.24 738.5,729.12 C21.1
Net*U1_5: *U1.5 CN1.3 | length 585.4
  Bottom Layer w15: CN1.3 258.06,977.53 302.58,977.53 351.61,1026.56 628.44,1026.56 679.39,975.61 *U1.5
Net*U1_6: *U1.6 CN1.2 | length 506.3
  Bottom Layer w15: CN1.2 321.77,951.72 361.61,991.56 595.16,991.56 629.39,957.33 *U1.6
Net*U1_7: *U1.7 C16.1 Y1.2 | length 468
  Bottom Layer w20: *U1.7 579.39,766.23 615.12,730.5 C16.1 616.93,724.75 616.93,696.25 721.61,591.56 Y1.2
Net*U1_8: *U1.8 C17.1 Y1.1 | length 289.9
  Bottom Layer w20: *U1.8 529.39,761.99 560.88,730.5 C17.1 560.88,611.09 541.35,591.56 Y1.1
NetC1_1: C1.1 D1.1 R3.1 RL1.4 | length 682.5
  Top Layer w25: D1.1 2035,1701.6 2089,1647.61 2089,1488.6 2057.95,1457.56 C1.1 2057.95,1452.44 2090.39,1420 2285,1420 2212.3,1347.3 2212.3,1307.25 R3.1
NetC4_2: C4.2 R4.1 T1.1 | length 148.9
  Top Layer w25: T1.1 1994.49,1286.05 1994.49,1208.57 C4.2 R4.1
NetC12_1: C12.1 U2.5 XTAL1.2 | length 411.8
  Top Layer w12: C12.1@1189.29,336.56 1189.29,384.24 1216.61,411.56 1278.23,411.56 1288.7,422.03 U2.5
  Top Layer w20: C12.1@1189.29,336.56 1189.29,212.41 XTAL1.2
NetC13_1: C13.1 U2.6 XTAL1.1 | length 503.3
  Top Layer w12: C13.1 1240.12,370.79 1249.33,380 1288.7,380 1308.39,399.68 U2.6
  Top Layer w20: C13.1 1240.12,253.26 1322.23,171.14 XTAL1.1
NetC14_2: C14.2 R8.1 RESET.2 ST_LINK.1 U2.7 U3.4 | length 4065.3
  Top Layer w12: U2.7 1328.07,460.26 1330.76,457.57 1330.76,383.48 1394.24,320 v2(1435,320)
  Top Layer w20: ST_LINK.1 655.47,190.47 655.47,160.51 625.47,130.51 625.47,89.49 679.96,35 1186.14,35 ; RESET.2 841.61,363.14 945.37,259.38 945.37,255.07 R8.1 ; R8.1 C14.2 968.66,206.3 994.97,180 1041.14,180 1049.97,171.18 1186.14,35 ; U3.4 2917.88,373.9 3015,276.78 3015,194.95 2855.05,35 v2(1305,35) 1186.14,35
  Bottom Layer w18: v2(1305,35) 1337.21,67.21 1337.21,282.63 1374.58,320 v2(1435,320)
NetC18_2: C18.2 R9.1 U2.12 USER.2@1804.27,371.01 | length 659.6
  Top Layer w12: U2.12 1426.5,481.66 1426.59,481.56 v2(1491.61,481.56)
  Top Layer w18: C18.2 R9.1 1682.08,257.88 1695.67,257.88 1804.27,366.48 1804.27,371.01 1804.27,378.88 1783.89,399.27 1763.91,399.27 v2(1761.61,401.56)
  Bottom Layer w18: v2(1491.61,481.56) 1571.61,401.56 v2(1761.61,401.56)
NetCN1_1: CN1.1 D6.1 T2.3 | length 736.5
  Bottom Layer w25: 202.05,926.13 CN1.1
  Bottom Layer w30: 202.05,926.13 76.61,1051.56 76.61,1166.56 111.61,1201.56 241.61,1201.56 260.3,1220.24 260.3,1247.57 279.29,1266.56 D6.1 294.06,1259.67 T2.3
NetD2_2: D2.2 IC1.2 L1.1 | length 1644.6
  Top Layer w30: D2.2 1434.63,1305 1373.13,1305 1355.55,1322.57 1355.55,1360 1315,1400.55 1202.17,1400.55 1158.29,1356.67 1158.29,1315 1138.29,1295 1011.44,1295 945.08,1361.37 925,1361.37 908.15,1378.22 908.15,1426.8 IC1.2 903.07,1508.02 1041.61,1646.56 1271.44,1646.56 1326.61,1701.74 1326.61,1783.18 1395,1851.56 1478.11,1851.56 L1.1
NetD3_1: POW-5V.1 R1.1 | length 80.2
  Top Layer w25: R1.1 POW-5V.1
NetD4_1: D4.1 ISO1.2 | length 116.2
  Top Layer w25: ISO1.2 2605,1186.56 D4.1
NetD5_1: POW-3.3.1 R5.1 | length 80.2
  Top Layer w25: R5.1 POW-3.3.1
NetD7_1: D7.1 R11.1 T2.1 | length 331.9
  Bottom Layer w30: D7.1 281.83,1455.56 362.65,1455.56 R11.1 370.55,1459.52 479.47,1350.6 T2.1
NetISO1_1: ISO1.1 R2.1 | length 114
  Top Layer w25: ISO1.1 2615,1096.56 2656.78,1096.56 2678.53,1118.31 2681.09,1118.31 2681.78,1119 R2.1
NetISO1_3: ISO1.3 R4.2 | length 136
  Top Layer w25: R4.2 2079.93,1160 2158.44,1160 2170,1171.56 ISO1.3
NetLDR1_2: LDR1.2 R7.2 R7.3 U2.10 | length 2543.5
  Top Layer w12: U2.10 1387.13,426.05 1401.61,411.56 1684,411.56 1724.88,452.45
  Top Layer w18: 1724.88,452.45 1911.61,639.18 1911.61,891.56 1981.61,961.56 3045,961.56
  Top Layer w25: 3045,961.56 3045,966.56 ; R7.2 3045,966.56 ; LDR1.2 3096.78,711.61 3145,759.83 R7.3 3045,966.56
NetP1_1: P1.1 RL1.2 | length 702.6
  Top Layer w60: RL1.2 2770,1890 2770,1628.22 3042.29,1355.93 3070.63,1355.93 P1.1
NetP1_2: P1.2 RL1.1 | length 1459.6
  Top Layer w60: RL1.1 2183.57,1663.57 2268.57,1663.57 2645,2040 2904.85,2040 2940,2004.85 2940,1667.24 3051.31,1555.93 3070.63,1555.93 P1.2
NetP1_3: P1.3 RL1.3 | length 1100.7
  Top Layer w60: RL1.3 2769.25,1420 2981.19,1208.06 3164.85,1208.06 3200,1243.21 3200,1635.9 3089.84,1746.06 P1.3
NetP2_2: ST_LINK.2 U2.37 | length 959.8
  Top Layer w12: 1074.37,731.56 1103.69,731.56 1129.44,757.31 U2.37
  Top Layer w18: ST_LINK.2 759.55,194.55 759.55,551.11 913.44,705 1047.81,705 1074.37,731.56
NetP2_4: ST_LINK.4 U2.34 | length 1407.7
  Top Layer w12: 1215.16,911.56 1249.33,877.39 U2.34
  Top Layer w18: 856.56,866.51 901.61,911.56 1215.16,911.56
  Top Layer w20: ST_LINK.4 525.47,159.53 525.47,271.01 695,440.54 695,547.81 856.56,709.37 856.56,866.51
NetR2_2: R2.2 U2.11 | length 1839.6
  Top Layer w12: U2.11 1406.91,488.52 1406.91,443.59 1413.94,436.56 1666.61,436.56 1723.72,493.67
  Top Layer w18: 1723.72,493.67 1876.61,646.56 1876.61,911.56 1966.61,1001.56 2650,1001.56 2741.61,1093.18 2741.61,1096.56 2741.96,1096.91 2741.96,1118.75 R2.2
NetR3_2: R3.2 T1.3 | length 141.4
  Top Layer w25: T1.3 2096.38,1361.37 2148.62,1309.12 R3.2
NetR6_1: R6.1 U2.18 | length 372.4
  Top Layer w12: U2.18 1558.98,639.2 1576.34,656.56
  Top Layer w18: 1576.34,656.56 1746.36,656.56 1812.49,722.69 R6.1
NetR10_2: R10.2 U2.44 | length 90.4
  Top Layer w12: R10.2 1074.37,606.56 1096.61,606.56 1109.47,619.42 1157.7,619.42 U2.44
NetR12_2: R12.2 U2.20 | length 196.7
  Top Layer w12: U2.20 1478.76,678.66 1548.72,678.66 1621.61,751.56 R12.2
NetU2_13: U2.13 U3.5 | length 1643.8
  Top Layer w12: U2.13 1520.72,540.77 v2(1586.61,474.88)
  Top Layer w25: v2(2540,220) 2615,295 2615,410 2657.64,452.64 U3.5
  Bottom Layer w18: v2(1586.61,474.88) 1588.91,472.59 1588.91,465.31 1601.61,452.61 2100.57,452.61 2333.18,220 v2(2540,220)
NetU2_14: U2.14 U3.15 | length 1260.7
  Top Layer w12: U2.14 1582.72,560.46 v2(1651.61,491.56)
  Top Layer w18: U3.15 2306.42,216.42 2390,300 v2(2390,310)
  Bottom Layer w18: v2(1651.61,491.56) 2253.44,491.56 2390,355 v2(2390,310)
NetU2_15: U2.15 U3.12 | length 793.6
  Top Layer w12: U2.15 1630.69,580.14 v2(1679.27,531.56)
  Top Layer w18: v2(2071.61,536.56) 2076.61,536.56 2160.54,452.64 U3.12
  Bottom Layer w18: v2(1679.27,531.56) 1684.27,536.56 v2(2071.61,536.56)
NetU2_16: U2.16 U3.13 | length 1098.1
  Top Layer w12: U2.16 1663.35,599.83 1683.03,580.14 v2(1741.61,580.14)
  Top Layer w18: U3.13 2266.66,373.9 2325,432.24 v2(2325,515)
  Bottom Layer w18: v2(1741.61,580.14) 2259.86,580.14 v2(2325,515)
NetU2_17: U2.17 U3.14 | length 1289.3
  Top Layer w12: U2.17 1773.81,619.51 1780.86,626.56 v2(1785.73,626.56) v2@1781.37,622.2
  Top Layer w18: U3.14 2244.84,295.16 2380,430.32 v2(2380,525)
  Bottom Layer w18: v2(1785.73,626.56) 2315,626.56 2380,561.56 v2(2380,525)
pads on no net: *U1.9 *U1.10 *U1.11 *U1.12 *U1.13 *U1.14 *U1.15 CN1.0 H1.H H2.H H3.H H4.H IC1.7 IC1.8 U2.2 U2.3 U2.4 U2.19 U2.21 U2.22 U2.25 U2.26 U2.27 U2.28 U2.29 U2.32 U2.33 U2.38 U2.39 U2.40 U2.41 U2.42 U2.43 U2.45 U2.46 U3.6 U3.7 U3.8 U3.10 U3.11
copper on no net:
  other v6: 213.39,1680.25

## Polygon pours and split planes (outlines as drawn)
GND on Top Layer "GND_L01_P002" (solid, remove dead copper, pour order 2): 0,2095 2080,2095 2076.61,2091.61 2076.61,1361.37 2148.62,1335 2495,1335 2840,1224.07 2840,1126.56 2845,1121.56 3215,1121.56 3215,649.37 3070.63,505 2917.88,505 2917.88,787.12 2872.79,832.21 2130,832.21 2130,110 2035,15 5,15
GND on Bottom Layer "GND_L02_P000" (solid, remove dead copper, pour order 0): 10,2105 20,2095 2135,2095 2135,1360 2115,1340 2120,1335 2495,1335 2495,1250 2505,1260 2840,1260 2840,1115 2830,1105 3235,1105 3235,5 3225,-5 5,-5 5,2085 -5,2095

## Silkscreen, mask and mechanical layers (free items; w line width, h text height)
Top Overlay:
  circle w10: c1965,1540 r5.02
  circle w10: c75,1385 r5
  circle w10: c940,880 r7.07
  region: 517.57,257.72 517.57,284.93 437.57,284.93 437.57,257.72
  text "NC-C-NO" at 3020,1875 h30 r90
  text "LoRa NodeDevice  / Version: 1.0" at 2170,773.62 h35
  text "3.3" at 25,675 h30 r270
  text "RX" at 25,565 h30 r270
  text "TX" at 25,465 h30 r270
  text "GND" at 25,375 h30 r270
Mechanical 1:
  lines w4: 3238.66,2093.66 3238.66,0 0,0 0,2095 3238.66,2095

## Text inside footprints (layer, text, board x,y; h text height)
ST_LINK: Top Overlay "2" at 775,130 h28 r90; Top Overlay "1" at 755,230 h28 r90; Top Overlay "9" at 215,230 h28 r90; Top Overlay "10" at 215,130 h28 r90